# Altium PCB Bosch.PcbDoc
Units mil, origin at the board's own origin, x right, y up, seen from the top; angles counter-clockwise.
Board outline 2820 x 3010 mil, 2 copper layers (Top Layer, Bottom Layer); 43 components, 33 nets, 176 pads, 40 vias.
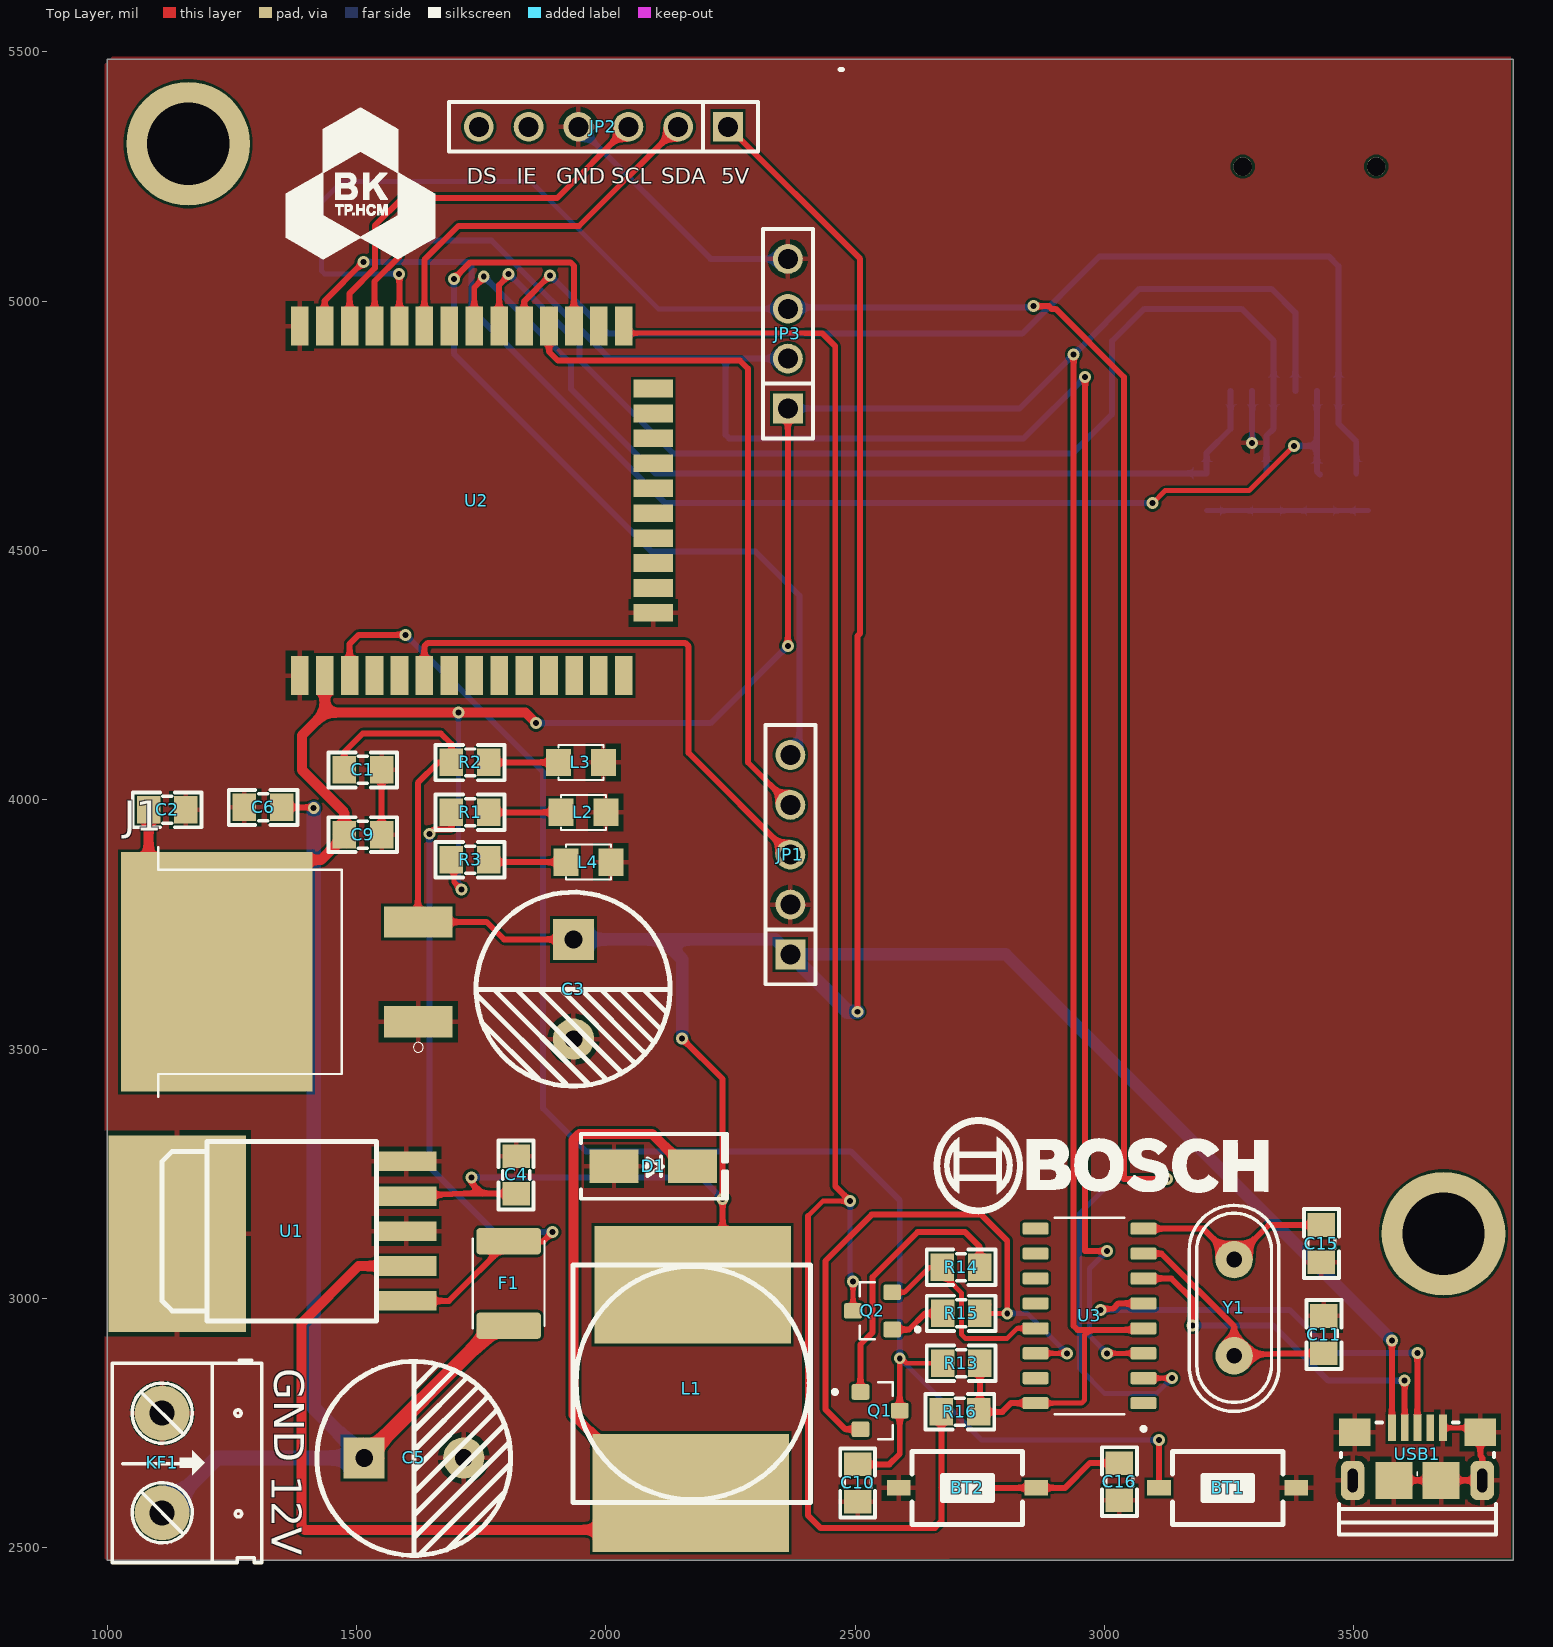
[diagram p0: Top Layer view]
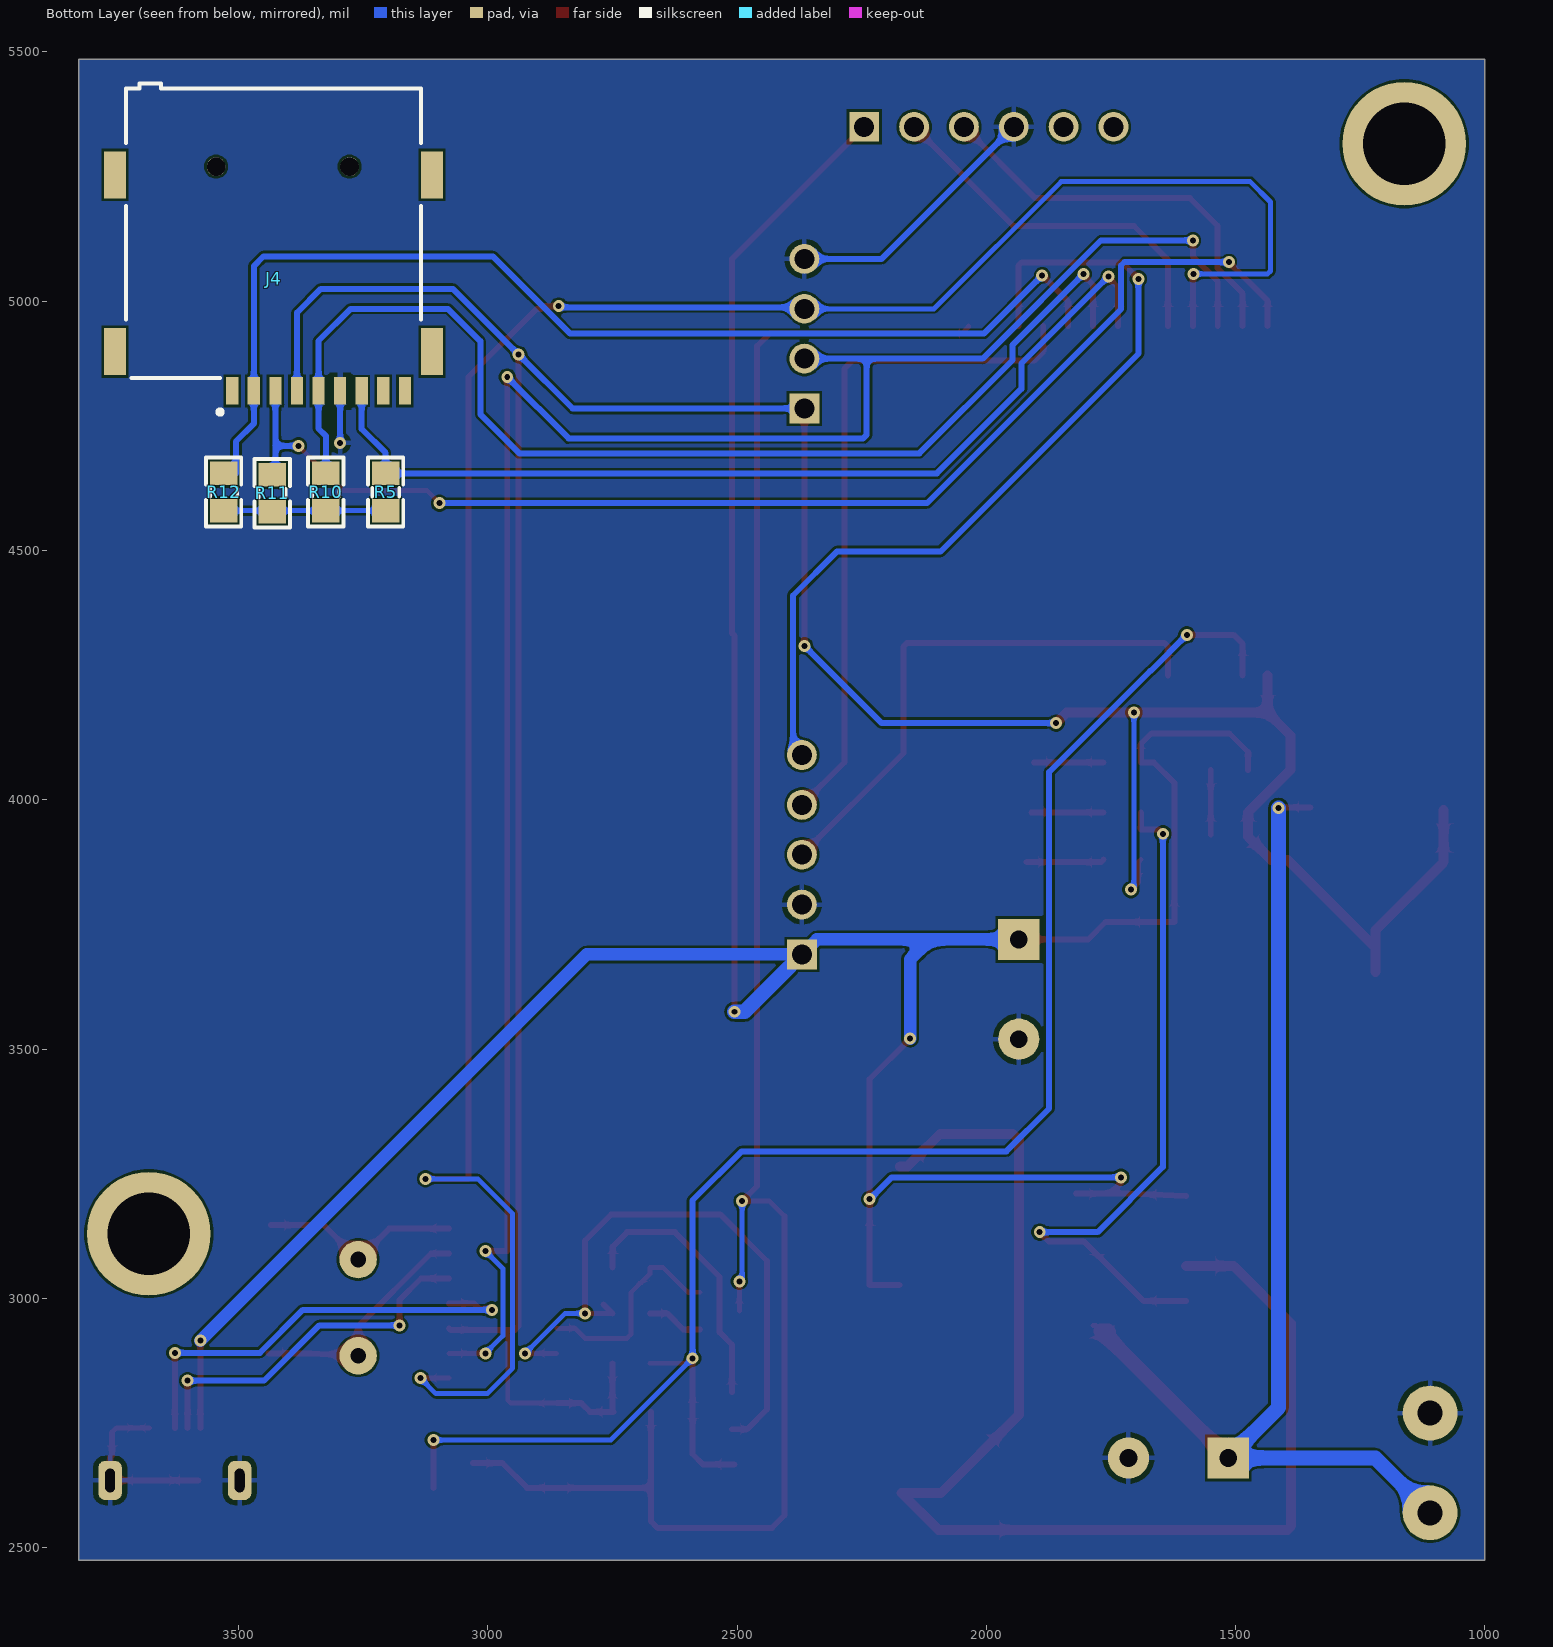
[diagram p1: Bottom Layer view, seen from below]
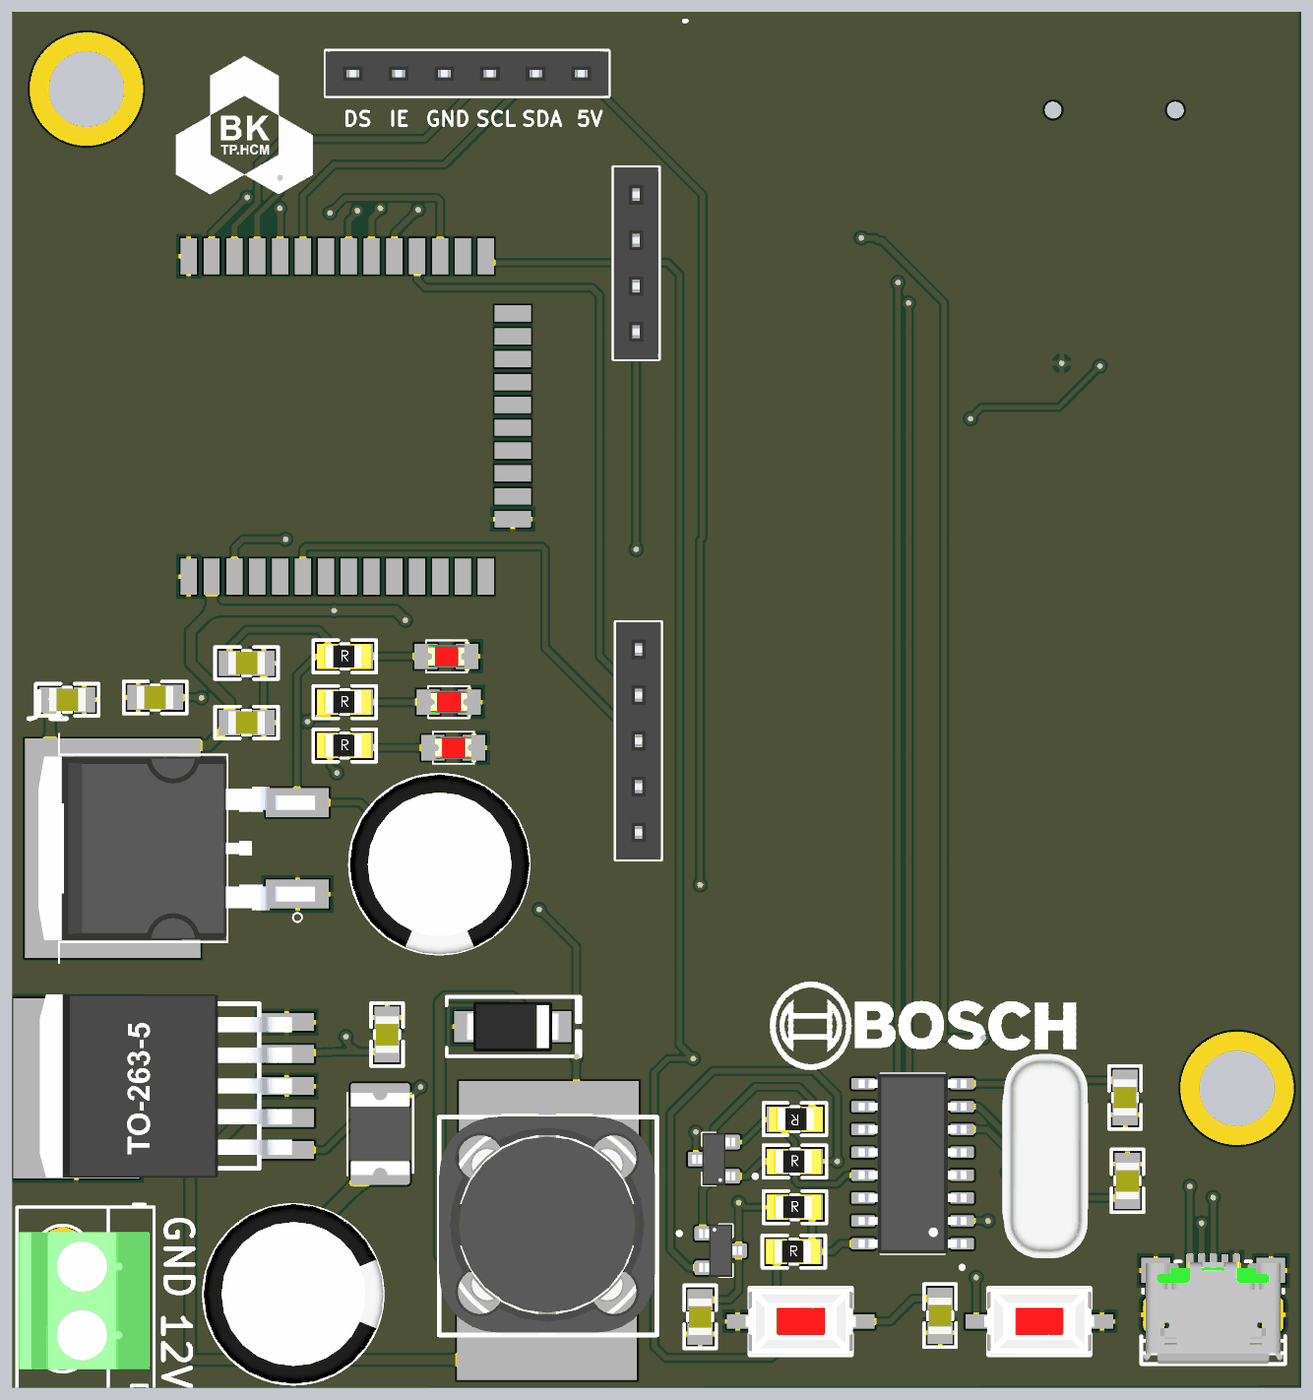
[diagram p2: 3D render of the assembled board from above, using the file's embedded part models]
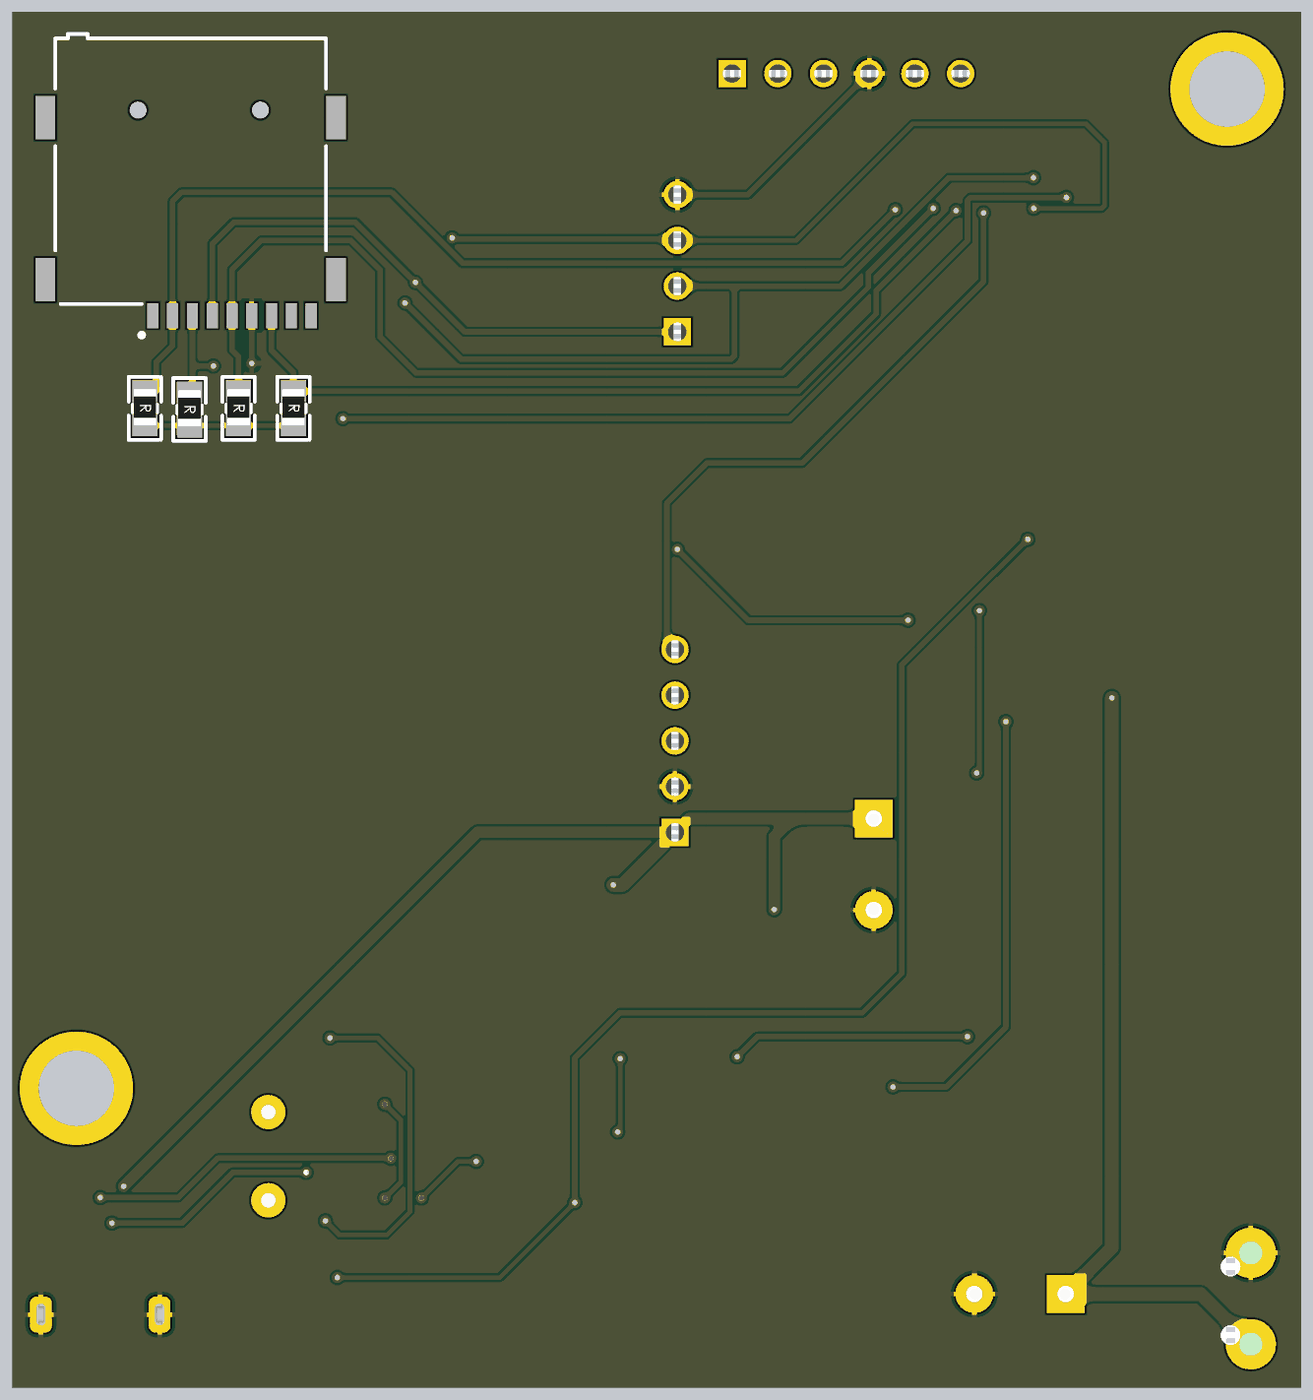
[diagram p3: 3D render of the assembled board from below, using the file's embedded part models]

## Layer stack, top to bottom
Top Solder: solder mask 0.4, Solder Resist, Dk 3.5
Top Layer: signal copper 1.4
Dielectric 1: dielectric 12.6, FR-4, Dk 4.8
Bottom Layer: signal copper 1.4
Bottom Solder: solder mask 0.4, Solder Resist, Dk 3.5

## Board outline
1000,2475 3820,2475 3820,5485 1000,5485

## Design rules (kind name [scope] priority, off if disabled: settings)
Clearance [All] p1: gap=5 ignorepadtopadclearanceinfootprint=FALSE
PolygonConnect [All] p1: connectstyle=Relief reliefconductorwidth=10 reliefentries=4 polygonreliefangle="90 Angle" airgapwidth=10
RoutingVias [All] p1: holewidth=12 width=24 viastyle="Through Hole" minholewidth=28 minwidth=50 maxholewidth=28 maxwidth=50
SolderMaskExpansion [All] p1: expansion=4 istentingtop=FALSE
Width [All] p1: maxlimit=50 minlimit=10 preferedwidth=12 minimp=50.000000 maximp=50.000000 favimp=50.000000
30 further rules are at their usual default settings.

## Classes and differential pairs
component class Bosch2: BT1 BT2 C9 C10 C11 C15 C16 J4 Q1 Q2 R5 R10 R11 R12 R13 R14 R15 R16 U2 U3 USB1 Y1
component class Bosch: C1 C2 C3 C4 C5 C6 D1 F1 J1 JP1 JP2 JP3 KF1 L1 L2 L3 L4 R1 R2 R3 U1

## Components (designator, comment, footprint, x,y, rotation, side; value= is the part's Value field where it differs from the comment)
BT1 "Nut Nhan 2 Chan SMD 3x6x2.5" "Nut Nhan 2 Chan SMD 3x6x2.5" 3247.2,2620 r180 top
BT2 "Nut Nhan 2 Chan SMD 3x6x2.5" "Nut Nhan 2 Chan SMD 3x6x2.5" 2725,2620 r0 top
C1 "10uF" "tu 0805" 1512.43,4060.13 r0 top
C2 "10uF" "tu 0805" 1120,3980 r0 top
C3 "680uF" "tu hoa 10mm" 1935,3620 r270 top
C4 "10uF" "tu 0805" 1819.87,3247.43 r90 top
C5 "220uF" "tu hoa 10mm" 1615,2680 r0 top
C6 "680pF" "tu 0805" 1312.57,3984.87 r180 top
C9 "106" "tu 0805" 1512.43,3930.13 r0 top
C10 "106" "tu 0805" 2505,2630 r270 top
C11 "22p" "tu 0805" 3440.13,2927.57 r270 top
C15 "22p" "tu 0805" 3435,3110 r270 top
C16 "106" "tu 0805" 3030.13,2632.57 r270 top
D1 "M7" "DIODE SMA" 2095,3265 r0 top
F1 "3A 24V" "Cau chi tu phuc hoi 2A 24V SMD1812" 1805,3030 r90 top
J1 "LD1085D2T33R" LD1085D2T33R 1360,3655 r180 top
J4 "Micro SD card socket 9P" "Micro SD card socket" 3411.14,5270 r0 bottom
JP1 "Radar" "JP 1x5 CT" 2370,3690 r90 top
JP2 "Lidar" "JP 1x6 CT" 2245,5350 r180 top
JP3 "GPS" "JP 1x4 CT" 2365,4785 r90 top
KF1 "CON 2 KF301" "Con 2 KF301 5.08" 1110,2770 r270 top
L1 "33uH - 3A SMD" "Cuon Cam 12x12x10" 2410.16,3066.69 r180 top
L2 "LED 0805" LED-0805-Red 1910,3975 r0 top
L3 "LED 0805" LED-0805-Red 1905,4075 r0 top
L4 "LED 0805" LED-0805-Red 1920,3875 r0 top
Q1 "BC847B" TRANS_BC847B 2550,2775 r0 top
Q2 "BC847B" TRANS_BC847B 2535,2975 r180 top
R1 "820R" "Tro SMD 0805" 1727.43,3977.39 r0 top
R2 "820R" "Tro SMD 0805" 1727.43,4077.39 r0 top
R3 "820R" "Tro SMD 0805" 1727.43,3882.39 r0 top
R5 "10K" "Tro SMD 0805" 3202.61,4617.57 r270 bottom
R10 "10K" "Tro SMD 0805" 3322.61,4617.57 r270 bottom
R11 "10K" "Tro SMD 0805" 3430,4615 r270 bottom
R12 "10K" "Tro SMD 0805" 3527.61,4617.57 r270 bottom
R13 "4k7" "Tro SMD 0805" 2712.43,2872.39 r0 top
R14 "10k" "Tro SMD 0805" 2712.43,3060 r180 top
R15 "10k" "Tro SMD 0805" 2712.43,2972.39 r0 top
R16 "4k7" "Tro SMD 0805" 2710,2775 r0 top
U1 "LM2576HVS 5.0V SMD" TO263-5 1370,3135 r90 top
U2 "ESP32-S" ESP32-S 1740.47,4599.8 r90 top
U3 "CH340G" SOIC127P600X180-16N 2970,2965 r180 top
USB1 "USB Micro 5p DIP" "USB Micro 5p DIP" 3627.76,2635 r0 top
Y1 "12Mhz" "Thach Anh 2 chan cam" 3260,2981.46 r90 top value=4Mhz

## Footprints (in the part's own frame and the unit in brackets; to place one, negate y for a bottom-side part, rotate by r counter-clockwise, add the part's x,y. Pads: shape width x height; smd on the part's side, far side on the other; paste and mask are expansions set on the pad)
"Cau chi tu phuc hoi 2A 24V SMD1812" [mm]
  rrect25% 1.34x3.29 smd: 1(-2.15,0) 2(2.15,0)
  silkscreen extent -2.28,-1.82 2.28,1.82, body extent -2.27,-1.62 2.27,1.62, height 1.25
"Con 2 KF301 5.08" [mil]
  round 110 hole 50: 1(0,0) 2(200,0)
  silkscreen extent -106,-100 300,200, body extent -45,-97 255,190, height 335
"Cuon Cam 12x12x10" [mm] "Cuon Cam 12x12x10"
  rect 10x6 smd: 1(6.1,11.6) 2(6,1)
  silkscreen extent 0,0 12.1,12.1, body extent 0.1,-0.2 12.1,12.14, height 7.51
"DIODE SMA" [mm] "SMA"
  rect 2.5x1.7 smd: 1(-2,0) 2(2,0)
  silkscreen extent -3.68,-1.65 3.75,1.65, body extent -2.6,-1.37 2.6,1.37, height 2.4
ESP32-S [mm]
  rect 2x0.9 smd: 1(-8.9,9.005) 2(-8.9,7.735) 3(-8.9,6.465) 4(-8.9,5.195) 5(-8.9,3.925) 6(-8.9,2.655) 7(-8.9,1.385) 8(-8.9,0.115) 9(-8.9,-1.155) 10(-8.9,-2.425) 11(-8.9,-3.695) 12(-8.9,-4.975) 13(-8.9,-6.235) 14(-8.9,-7.505) 25(8.9,-7.505) 26(8.9,-6.235) 27(8.9,-4.965) 28(8.9,-3.695) 29(8.9,-2.425) 30(8.9,-1.155) 31(8.9,0.115) 32(8.9,1.385) 33(8.9,2.655) 34(8.9,3.925) 35(8.9,5.195) 36(8.9,6.465) 37(8.9,7.735) 38(8.9,9.005)
  rect 0.9x2 smd: 15(-5.71,-9.005) 16(-4.44,-9.005) 17(-3.17,-9.005) 18(-1.9,-9.005) 19(-0.63,-9.005) 20(0.64,-9.005) 21(1.91,-9.005) 22(3.18,-9.005) 23(4.45,-9.005) 24(5.72,-9.005)
"JP 1x4 CT" [mm]
  rect 1.52x1.52 hole 1.02: 1(0,0)
  round 1.52 hole 1.02: 2(2.54,0) 3(5.08,0) 4(7.62,0)
  silkscreen extent -1.52,-1.27 9.14,1.27, body extent -1.52,-1.25 9.14,1.25, height 8.51
"JP 1x5 CT" [mm]
  rect 1.52x1.52 hole 1.02: 1(0,0)
  round 1.52 hole 1.02: 2(2.54,0) 3(5.08,0) 4(7.62,0) 5(10.16,0)
  silkscreen extent -1.52,-1.27 11.68,1.27, body extent -1.52,-1.25 11.68,1.25, height 8.51
"JP 1x6 CT" [mm] "6 row, straight, gold plating"
  rect 1.52x1.52 hole 1.02: 1(0,0)
  round 1.52 hole 1.02: 2(2.54,0) 3(5.08,0) 4(7.62,0) 5(10.16,0) 6(12.7,0)
  silkscreen extent -1.52,-1.27 14.22,1.27, body extent -1.52,-1.25 14.22,1.25, height 8.51
LD1085D2T33R [mm]
  rect 3.5x1.6 smd: 1(-6.7,2.54) 2(-6.7,-2.54)
  rect 9.75x12.2 smd: 3(3.575,0)
  silkscreen extent -6.95,-6.35 6.55,6.35, body extent -7.71,-5.1 7.71,5.1, height 4.6
LED-0805-Red [mil]
  rect 50x55 smd: 1(0,0) 2(90,0)
  silkscreen extent 0,-35 90,35, body extent 5,-25 85,25, height 43
"Micro SD card socket" [mm] "9 Pin"
  rect 0.62x1.4 smd: 1(2.58,11.42) 2(1.48,11.42) 3(0.38,11.42) 4(-0.72,11.42) 5(-1.82,11.42) 6(-2.92,11.42) 7(-4.02,11.42) 8(-5.12,11.42) 9(-6.22,11.42)
  rect 1.1x2.4 smd: SH1(-7.6,0.42) SH2(-7.6,9.42) SH3(8.55,9.42) SH4(8.55,0.42)
  round 0.95 hole 0.95 unplated: ""(-3.4,0) ""(3.4,0)
  silkscreen extent -7.05,-4.23 8,12.62
"Nut Nhan 2 Chan SMD 3x6x2.5" [mm] "Switch SMD type"
  rect 1.2x0.8 smd: 1(-3.5,0) 2(3.5,0)
  silkscreen extent -2.82,-1.85 2.82,1.85, body extent -3.05,-1.85 3.05,1.85, height 2.5
SOIC127P600X180-16N [mm]
  rrect25% 1.31x0.62 smd: 1(-2.75,4.445) 2(-2.75,3.175) 3(-2.75,1.905) 4(-2.75,0.635) 5(-2.75,-0.635) 6(-2.75,-1.905) 7(-2.75,-3.175) 8(-2.75,-4.445) 9(2.75,-4.445) 10(2.75,-3.175) 11(2.75,-1.905) 12(2.75,-0.635) 13(2.75,0.635) 14(2.75,1.905) 15(2.75,3.175) 16(2.75,4.445)
  silkscreen extent -2.85,-5 1.78,5.85, body extent -3,-5 3,5, height 1.8
"Thach Anh 2 chan cam" [mm]
  round 1.905 hole 0.8: 1(-2.45,0) 2(2.45,0)
  silkscreen extent -5.28,-2.29 5.21,2.29, body extent -5.68,-2.36 5.68,2.29, height 3.5
TO263-5 [mil] "TO263-5"
  rect 39.37x120 smd: 1(-140,-230) 2(-70,-230) 3(0,-230) 4(70,-230) 5(140,-230)
  rect 393.7x275.59 smd: 6(-5,230)
  silkscreen extent -180,-170 180,260, body extent -200,-242 200,310, height 180
TRANS_BC847B [mm]
  rrect25% 0.9x0.8 smd: 1(-1,0.95) 2(-1,-0.95) 3(1,0)
  silkscreen extent -2.4,-1.45 0.65,1.45, body extent -1.2,-1.46 1.2,1.46, height 1.2
"Tro SMD 0805" [mm]
  rect 1.2x1.4 smd: 1(-0.946,-0.061) 2(0.954,-0.061)
  silkscreen extent -1.75,-0.97 1.75,0.84, body extent -1.56,-0.76 1.44,0.64, height 0.53
"tu 0805" [mm] "Compoment SMD 80x50mil"
  rect 1.2x1.4 smd: 1(-0.946,-0.003) 2(0.954,-0.003)
  silkscreen extent -1.75,-0.89 1.75,0.89, body extent -1.01,-0.64 1.01,0.63, height 0.61
"tu hoa 10mm" [mm]
  rect 2.1x2.1 hole 0.9: 1(-2.54,0)
  round 2.1 hole 0.9: 2(2.54,0)
  silkscreen extent -4.95,-4.96 4.93,4.92, body extent -5,-5 4.97,5, height 20.01
"USB Micro 5p DIP" [mm]
  rect 0.4x1.35 smd mask+0.05: 1(-1.3,2.675) 2(-0.65,2.675) 3(0,2.675) 4(0.65,2.675) 5(1.3,2.675)
  rrect60% 1.2x2 hole 0.5 slot 1.2 at 90 deg: 5(-3.3,0) 5(3.3,0)
  rect 1.6x1.4 smd: 5(-3.2,2.45) 5(3.2,2.45)
  rect 1.9x1.9 smd paste-10: 5(-1.2,0) 5(1.2,0)
  silkscreen extent -4,-2.75 4,2.95, body extent -3.93,-2.76 3.93,2.9, height 2.85

## Part data
C1 C2 C4 C6 C9 C10 C11 C15 C16: library part "Tu 0805 680pF 50V 10%", "Dán", Chung_Loai=Dán, Don_Vi=Con, Ma_Hang=MH008098, So_Chan=2, Ten_Linh_Kien="Tụ 0805 680pF 50V 10%"
C3 C5: library part "Tu Hoa 470uF 35V 10x15", "Cắm", Chung_Loai=Cắm, Don_Vi=Con, Ma_Hang=MH002204, So_Chan=2, Ten_Linh_Kien="Tụ Hóa 470uF 35V 10x15MM"
D1: library part "Diode M7 ( 4007 )", "Dán", Chung_Loai=Dán, Don_Vi=Con, Ma_Hang=MH000944, Ten_Linh_Kien="Diode M7 1N4007 SMD 1A 1000V"
F1: library part "Cau chi tu phuc hoi 2A 24V SMD1812", "2A 24V SMD1812", Ma_Hang=MH010033, Ten="Cầu Chì Tự Phục Hồi 2A 24V SMD1812"
J1: "Linear Voltage Regulator IC Positive Fixed 1 Output 3A D2PAK", Package="D2PAK STMicroelectronics", Check_prices=https://www.snapeda.com/parts/LD1085D2T33R/STMicroelectronics/view-part/?ref=eda, MF=STMicroelectronics, MP=LD1085D2T33R, SnapEDA_Link=https://www.snapeda.com/parts/LD1085D2T33R/STMicroelectronics/view-part/?ref=snap
J4: "9 (8 + 1) Position Card Connector microSD Surface Mount, Right Angle Gold", Package=Package, Availability="In Stock", Check_prices=https://www.snapeda.com/parts/MEM2075-00-140-01-A/Global%20Connector%20Technology/view-part/2680480/?ref=eda, MF="Global Connector Technology", MP=MEM2075-00-140-01-A, Price=None, SnapEDA_Link=https://www.snapeda.com/parts/MEM2075-00-140-01-A/Global%20Connector%20Technology/view-part/2680480/?ref=snap
JP1: library part "JP 1x5 2.54 Cai Thang", "Cắm", Chung_Loai=Cắm, Don_Vi=Con, Ma_Hang=MH004006, Ten_Linh_Kien="Jump Đơn Cái 2.54MM 1x20P Thẳng"
JP2: library part "JP 1x6 2.54 Cai Thang", "Cắm", Chung_Loai=Cắm, Don_Vi=Con, Ma_Hang=MH004006, Ten_Linh_Kien="Jump Đơn Cái 2.54MM 1x20P Thẳng"
JP3: library part "JP 1x4 2.54 Cai Thang", "Cắm", Chung_Loai=Cắm, Don_Vi=Con, Ma_Hang=MH004006, Ten_Linh_Kien="Jump Đơn Cái 2.54MM 1x20P Thẳng"
KF1: "Cắm", Chung_Loai=Cắm, Don_Vi=Con, Ma_Hang=MH000987, Ten_Linh_Kien="CON 2 KF301-2P 5.08MM Xanh Dương"
L1: library part "CUON CAM 100uH SMD", "Dán", Chung_Loai=Dán, Don_Vi=Con, Ten_Linh_Kien="Cuộn Cảm 100uH 7x7x4MM CD74"
L2 L3 L4: library part "LED 0805 Do", "Dán", Chung_Loai=Dán, Don_Vi=Con, Ma_Hang=MH000897, Ten_Linh_Kien="LED 0805 Màu Đỏ (Red)"
Q1 Q2: "BJT, SOT-23, 45V, 100mA, NPN, 0.25W, 150C", Package="SOT-23-3 Diotec", Check_prices=https://www.snapeda.com/parts/BC847B/Diotec/view-part/?ref=eda, MF="Diotec Semiconductor", MP=BC847B, SnapEDA_Link=https://www.snapeda.com/parts/BC847B/Diotec/view-part/?ref=snap
R1 R2 R3 R5 R10 R11 R12 R13 R14 R15 R16: library part "Tro 0805 5% 820R", "Dán", Chung_Loai=Dán, Don_Vi=Con, Ma_Hang=MH005346, So_Chan=2, Ten_Linh_Kien="Trở 0805 5% 820R"
U1: "Dán", Chung_Loai=Dán, Don_Vi=Con, Ma_Hang=MH002362, Ten_Linh_Kien="LM2576HVS-5.0V BUCK 5V 3A TO263-5"
U3: "USB Interface Integrated Circuit", Package=None, Availability="Not in stock", Check_prices=https://www.snapeda.com/parts/Ch340G/WCH/view-part/?ref=eda, MF=WCH, MP=Ch340G, Price=None, SnapEDA_Link=https://www.snapeda.com/parts/Ch340G/WCH/view-part/?ref=snap
USB1: "USB Type B", Ma_Hang=MH005145, Ten="MicroUSB MK5P DIP"
Y1: library part "Thach Anh 2 chan Cam", "Crystal For all Crystal 2pin."
BT1 BT2: Ma_Hang=MH001036, Ten="Nút Nhấn 2 Chân 3x6x2.5MM SMD"

## Free pads (board coordinates)
  round 248.03 hole 165.35: Screw(1162,5316) Screw(3680,3130)

## Via types
v1: diameter 24, hole 12, Top Layer to Bottom Layer, tented both sides, 40 vias

## Nets (pads, with @x,y where several pads share a name; then routed paths per layer and width w, separated by ;. In a path a pad name is that pad's centre, name@x,y a point inside that pad or via, vN(x,y) a via of type N, cw(c..) or ccw(c..) an arc to the next point about the centre after c; other vN are vias at no path point)
3V3: C2.1 C9.1 J1.3 J4.4 JP3.1 R3.1 R13.2 R16.2 U2.2 U3.4 U3.16 | length 6863.4
  Top Layer w10: R3.1 1695,3875.2 1695,3835 v1(1710,3820) ; U3.16 2954.14,2790 2960,2795.86 2960,2927 2970,2937
  Top Layer w12: v1(2365,4309) JP3.1 ; R13.2 2750,2775.03 R16.2 2795,2772.61 2812.39,2790 U3.16 ; v1(2938,4893) 2938,2944.87 2945.87,2937 2970,2937 3075.27,2937 U3.4
  Top Layer w20: C2.1 1082.77,3874.93 1219.25,3738.45 J1.3@1219.25,3703.23 ; J1.3 J1.3@1219.25,3703.23 ; U2.2 1435.94,4175 ; v1(1860,4154) 1839,4175 v1(1704,4175) 1435.94,4175 ; J1.3@1219.25,3703.23 1395.84,3879.82 1428.95,3879.82 1475.2,3926.06 C9.1 1475.2,3975 1390,4060.2 1390,4129.06 1435.94,4175
  Bottom Layer w10: v1(1704,4175) 1704,3829.79 1710,3823.79 v1(1710,3820)
  Bottom Layer w12: v1(1860,4154) 2210,4154 v1(2365,4309) ; JP3.1 2830,4785 v1(2938,4893) 3070,5025 3335,5025 3382.8,4977.2 J4.4
3V3_ETHERNET: R5.2 R10.2 R11.2 R12.2 | length 325
  Bottom Layer w10: R5.2 R10.2 R12.2
5V: C1.1 C3.1 C4.1 J1.2 JP1.1 JP2.1 L1.2 R2.1 U1.4 USB1.1 | length 6808.3
  Top Layer w12: C1.1 1475.2,4096 1512.32,4133.13 1669.07,4133.13 1690.2,4112 R2.1 1664,4075 1623,4034 1623,3755 J1.2 1761,3755 1796,3720 C3.1 ; U1.4 1715.2,3210.2 1751.8,3210.2 ; v1(1730,3243) 1730,3232 1751.8,3210.2 ; C4.1 1751.8,3210.2 ; v1(2153,3521) 2234,3440 v1(2234,3199) 2234,3027.32 L1.2 ; JP2.1 2510,5085 2510,4334.12 2505,4329.12 v1(2505,3575) ; USB1.1 v1(3576.57,2915.43)
  Bottom Layer w10: JP1.1 JP1.1@2394.92,3665.08
  Bottom Layer w12: v1(1730,3243) 2190,3243 v1(2234,3199)
  Bottom Layer w25: C3.1 2113,3720 ; v1(2153,3521) 2153,3680 2113,3720 ; v1(3576.57,2915.43) 2802,3690 JP1.1 2340,3720 2113,3720
  Bottom Layer w30: JP1.1@2394.92,3665.08 2485,3575 v1(2505,3575)
12V: F1.2 R1.1 U1.1 | length 1401.3
  Top Layer w12: U1.1 1685.35,2995 F1.2 1874.65,3114.65 v1(1893,3133) ; v1(1646,3932) 1655,3941 1690.2,3941 R1.1
  Bottom Layer w12: v1(1646,3932) 1646,3264 1777,3133 v1(1893,3133)
CS: J4.2 R12.1 U2.29 | length 2256
  Top Layer w12: U2.29 1835.94,4999.94 v1(1888,5052)
  Bottom Layer w12: v1(1888,5052) 2005,4935 2835,4935 2990,5090 3450,5090 3469.41,5070.59 J4.2 3469.41,4754.59 3505,4719 R12.1@3505,4654.8
DTR: Q2.2 R14.2 U3.13 | length 431.7
  Top Layer w10: Q2.2 2599,3012.4 2648.99,3062.39 R14.2 2674.85,3049.33 2713,3011.18 2713,2928 2721,2920 2805,2920 2825,2940 U3.13
EN_ESP32: BT1.2 C10.1 Q1.3 R13.1 U2.3 | length 3415.3
  Top Layer w10: v1(2589.37,2880) 2593.16,2880 2603.16,2870 R13.1
  Top Layer w12: U2.3 1485.94,4312.94 1504,4331 v1(1598,4331) ; C10.1 2568.6,2667.23 2589.37,2688 Q1.3 v1(2589.37,2880) ; v1(3109,2716) 3109,2620 BT1.2
  Bottom Layer w10: v1(2589.37,2880) 2753.37,2716 v1(3109,2716)
  Bottom Layer w12: v1(1598,4331) 1670.5,4258.5 1671.42,4258.5 1874,4055.91 1874,3381 1960,3295 2491,3295 2589.37,3196.63 v1(2589.37,2880)
GND: BT1.1 BT2.1 C1.2 C2.2 C3.2 C4.2 C5.2 C6.2 C9.2 C10.2 C11.1 C15.2 C16.2 D1.1 J1.1 J4.6 JP1.2 JP2.4 JP3.4 KF1.1 L2.2 L3.2 L4.2 U1.3 U1.5 U1.6 U2.1 U2.15 U2.38 USB1.5 | length 1117.9
  Top Layer w10: USB1.5@3678.94,2740.32 3744.88,2740.32 USB1.5@3753.74,2731.46
  Top Layer w12: C9.2 C1.2 ; USB1.5@3580.51,2635 3675,2635 3757.68,2635 3757.68,2681 3753.74,2684.94 USB1.5@3753.74,2731.46
  Bottom Layer w12: JP2.4 2210,5085 JP3.4 ; v1(3296.18,4716) J4.6
IO0: BT2.2 C16.1 Q2.3 R16.1 U2.25 | length 3969.9
  Top Layer w10: U2.25 2035.94,4948.61 2048.66,4935.9 2398.38,4935.9 ; 2405,3165 2435,3195 v1(2490,3195) ; Q2.3 v1(2495.63,3034.37)
  Top Layer w12: 2398.38,4935.9 2434.1,4935.9 2460,4910 2460,3225 v1(2490,3195) ; 2405,3165 2405,2565 2430,2540 2660,2540 2672.77,2552.77 2672.77,2620 ; R16.1 2672.77,2620 ; C16.1 2970.8,2669.8 2921,2620 BT2.2 2672.77,2620
  Bottom Layer w10: v1(2490,3195) 2490,3043.79 2495.63,3038.16 v1(2495.63,3034.37)
MISO: J4.7 R5.1 U2.31 | length 1936.7
  Top Layer w12: U2.31 1735.94,5027.7 1755,5046.75 v1(1755,5050)
  Bottom Layer w12: v1(1755,5050) 1929.75,4875.25 1929.75,4824.25 2099.2,4654.8 R5.1 3205,4696 3252.87,4743.87 J4.7
MOSI: J4.3 R11.1 U2.37 | length 2543.1
  Top Layer w10: v1(3096.57,4595) 3121.57,4620 3290,4620 v1(3380,4710)
  Top Layer w12: U2.37 1435.94,5001 v1(1513.65,5078.7)
  Bottom Layer w12: v1(1513.65,5078.7) 1722.97,5078.7 1730,5071.67 1730,4984.22 2119.22,4595 v1(3096.57,4595) ; v1(3380,4710) 3426.1,4710 ; J4.3 3426.1,4710 ; R11.1 3426.1,4658.52 3426.1,4710
NetC5_1: C5.1 C6.1 F1.1 KF1.2 | length 2250.5
  Top Layer w10: F1.1@1770,2935 1780.35,2945.35 F1.1@1786.5,2945.35
  Top Layer w12: C6.1 1413,3985 v1(1414,3984)
  Top Layer w30: C5.1 1755.24,2920.24 1755.24,2933.98 1756.26,2935 F1.1@1770,2935
  Bottom Layer w30: KF1.2 1220,2680 C5.1 1414,2781 v1(1414,3984)
NetC11_2: C11.2 U3.7 Y1.1 | length 481.3
  Top Layer w12: U3.7 3114,3090 3260,2944 Y1.1 3355,2890 C11.2
NetC15_1: C15.1 U3.8 Y1.2 | length 411
  Top Layer w12: U3.8 3197.91,3140 Y1.2 3329.32,3147.23 C15.1
NetD1_2: D1.2 L1.1 U1.2 | length 2602.4
  Top Layer w20: U1.2 1504,3065 1389,2950 1389,2543.03 1396.03,2536 2096,2536 L1.1 2091.26,2610 1935,2766.26 1935,3318.28 1946.72,3330 2092.99,3330 2157.99,3265 D1.2
NetL2_1: L2.1 R1.2 | length 145
  Top Layer w12: R1.2 L2.1
NetL3_1: L3.1 R2.2 | length 140
  Top Layer w12: R2.2 L3.1
NetL4_1: L4.1 R3.2 | length 157.1
  Top Layer w12: R3.2 1770,3875 L4.1
NetQ1_1: Q1.1 R14.1 | length 546.2
  Top Layer w12: Q1.1 2510.63,2907.63 2535,2932 2535,3043 2625,3133 2720.65,3133 2749.65,3104 R14.1
NetQ2_1: Q2.1 R15.1 | length 114.2
  Top Layer w12: Q2.1 2608,2937.6 2640.4,2970 R15.1
NetU3_5: U3.5 USB1.3 | length 913.7
  Top Layer w12: v1(2992,2977) 2994.3,2979.3 3017.3,2979.3 3028,2990 U3.5 ; USB1.3 v1(3627.76,2891)
  Bottom Layer w12: v1(2992,2977) 3371,2977 3457,2891 v1(3627.76,2891)
NetU3_6: U3.6 USB1.2 | length 733.4
  Top Layer w12: U3.6 3134,3040 3177,2997 v1(3177,2946) ; USB1.2 v1(3602.17,2835)
  Bottom Layer w12: v1(3177,2946) 3338,2946 3449,2835 v1(3602.17,2835)
RTS: Q1.2 R15.2 U3.14 | length 1252
  Top Layer w10: R15.2 v1(2805,2970) ; U3.14 v1(2925,2890)
  Top Layer w12: Q1.2 2480,2737.6 2440,2777.6 2440,3075 2533,3168 2753,3168 2805,3116 v1(2805,2970) ; R15.2 R15.2@2767.62,2987.62
  Bottom Layer w10: v1(2805,2970) 2845,2970 v1(2925,2890)
RX0: JP3.3 U2.34 U3.2 | length 4676.8
  Top Layer w10: U3.2 v1(3135,2840)
  Top Layer w12: U2.34 v1@1585.94,5055 ; v1(2857.74,4990.26) 2888.47,4990.26 2893.74,4985 2902.15,4985 3039,4848.15 3039,3240 v1(3125,3240)
  Bottom Layer w10: v1(1585,5055) 1435.86,5055 1430,5060.86 1430,5199.14 1470.86,5240 1850,5240 2105,4985 JP3.3 ; v1(3125,3240) 3020,3240 2950,3170 2950,2860 3000.86,2809.14 3104.14,2809.14 v1(3135,2840)
  Bottom Layer w12: JP3.3 2367.97,4987.97 2855.44,4987.97 v1(2857.74,4990.26)
RX1: U2.17
RX2: JP1.5 U2.27 | length 1760.2
  Top Layer w12: v1(1695,5045) 1728,5078 1928.91,5078 1935.94,5070.97 U2.27
  Bottom Layer w12: v1(1695,5045) 1695,4895 2092,4498 2300,4498 2388,4410 2388,4090 JP1.5
SCK: J4.5 R10.1 U2.30 | length 2318.6
  Top Layer w12: U2.30 1785.94,5032.7 1805,5051.75 v1(1805,5055)
  Bottom Layer w12: v1(1805,5055) 1947.34,4912.66 1947.34,4882.16 2134.5,4695 2936.65,4695 3015,4773.35 3015,4920 3080,4985 3275,4985 3339.49,4920.51 J4.5 3339.49,4744.49 3325,4730 R10.1
SCL: JP2.3 U2.36 | length 813.2
  Top Layer w12: U2.36 1485.94,5015.94 1536.65,5066.65 1536.65,5152 1591.65,5207 1902,5207 JP2.3
SDA: JP2.2 U2.33 | length 752.4
  Top Layer w12: U2.33 1635.94,5082.94 1704,5151 1946,5151 JP2.2
TX0: JP3.2 U2.35 U3.3 | length 4092
  Top Layer w10: v1(3005,2890) U3.3
  Top Layer w12: U2.35 1535.94,5040 1585.63,5089.69 v1(1585.63,5122) ; v1(2961,4848) 2961,3095 v1@2995,3095
  Bottom Layer w10: v1(3005,2890) 2970,2925 2970,3060 v1(3005,3095)
  Bottom Layer w12: v1(1585.63,5122) 1770.53,5122 2007.53,4885 2240,4885 ; JP3.2 2240,4885 ; v1(2961,4848) 2838,4725 2247.03,4725 2240,4732.03 2240,4885
TX1: U2.18
TX2: JP1.4 U2.28 | length 1374.5
  Top Layer w12: U2.28 1885.94,4899.06 1904,4881 2269,4881 2285,4865 2285,4075 JP1.4
VO: JP1.3 U2.6 | length 1096.9
  Top Layer w12: U2.6 1635.94,4307.97 1642.97,4315 2158.97,4315 2166,4307.97 2166,4094 JP1.3
pads on no net: J4. J4.1 J4.8 J4.9 J4.SH1 J4.SH2 J4.SH3 J4.SH4 JP2.5 JP2.6 U2.4 U2.5 U2.7 U2.8 U2.9 U2.10 U2.11 U2.12 U2.13 U2.14 U2.16 U2.19 U2.20 U2.21 U2.22 U2.23 U2.24 U2.26 U2.32 U3.1 U3.9 U3.10 U3.11 U3.12 U3.15 USB1.4

## Polygon pours and split planes (outlines as drawn)
GND on Bottom Layer "GND_L01_P-001" (solid, pour order 0): 1000,2475 1000,5485 3820,5485 3820,2475
GND on Top Layer "GND_L01_P-001" (solid, pour order 2): 995,2475 995,5475 1010,5490 3815,5490 3815,2480

## Silkscreen, mask and mechanical layers (free items; w line width, h text height)
Top Overlay:
  drawing of 4983 lines, arcs and shapes, not listed
  text "DS" at 1720.91,5235.91 h31.5
  text "IE" at 1820.91,5235.91 h31.5
  text "GND" at 1900.91,5235.91 h31.5
  text "SCL" at 2010.91,5235.91 h31.5
  text "SDA" at 2110.91,5235.91 h31.5
  text "5V" at 2230.91,5235.91 h31.5
  text "GND" at 1335,2860 h60 r270
  text "12V" at 1330,2645 h60 r270